# Altium PCB ResistorCard205.PcbDoc
Units mm, origin at the board's own origin, x right, y up, seen from the top; angles counter-clockwise.
Board outline 40 x 25 mm, 2 copper layers (Top Layer, Bottom Layer); 26 components, 184 nets, 76 pads, 0 vias.
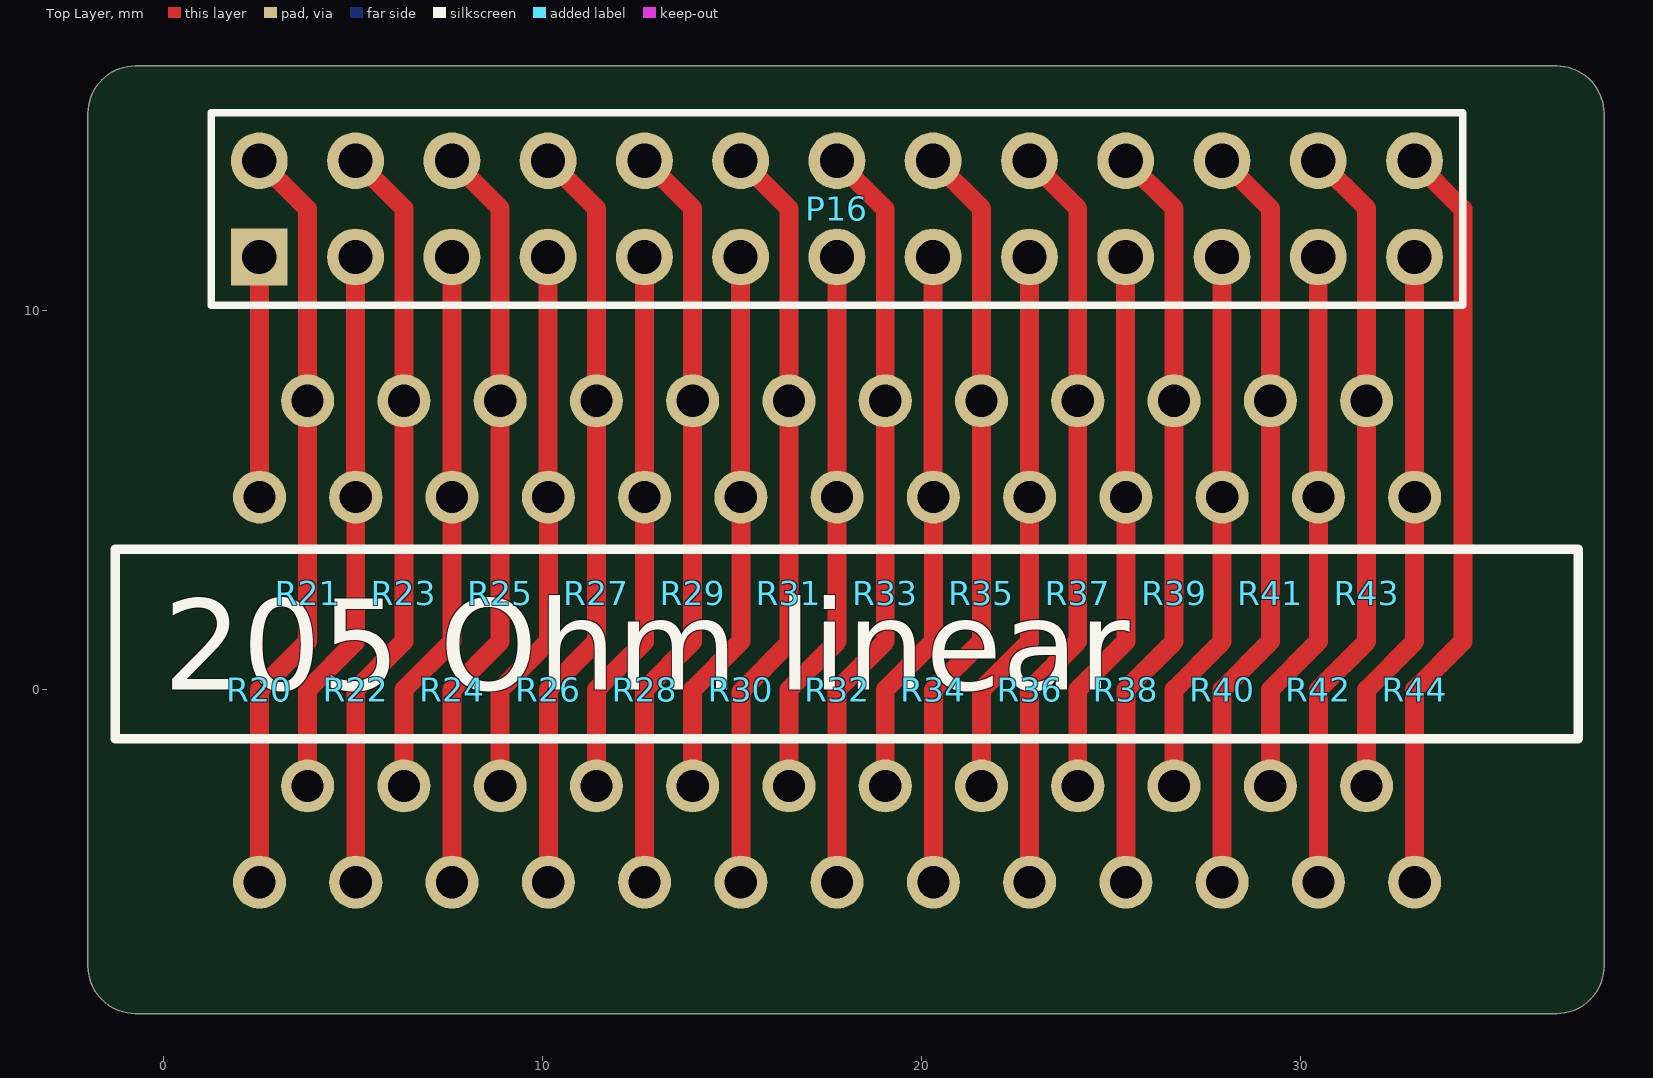
[diagram p0: Top Layer view]
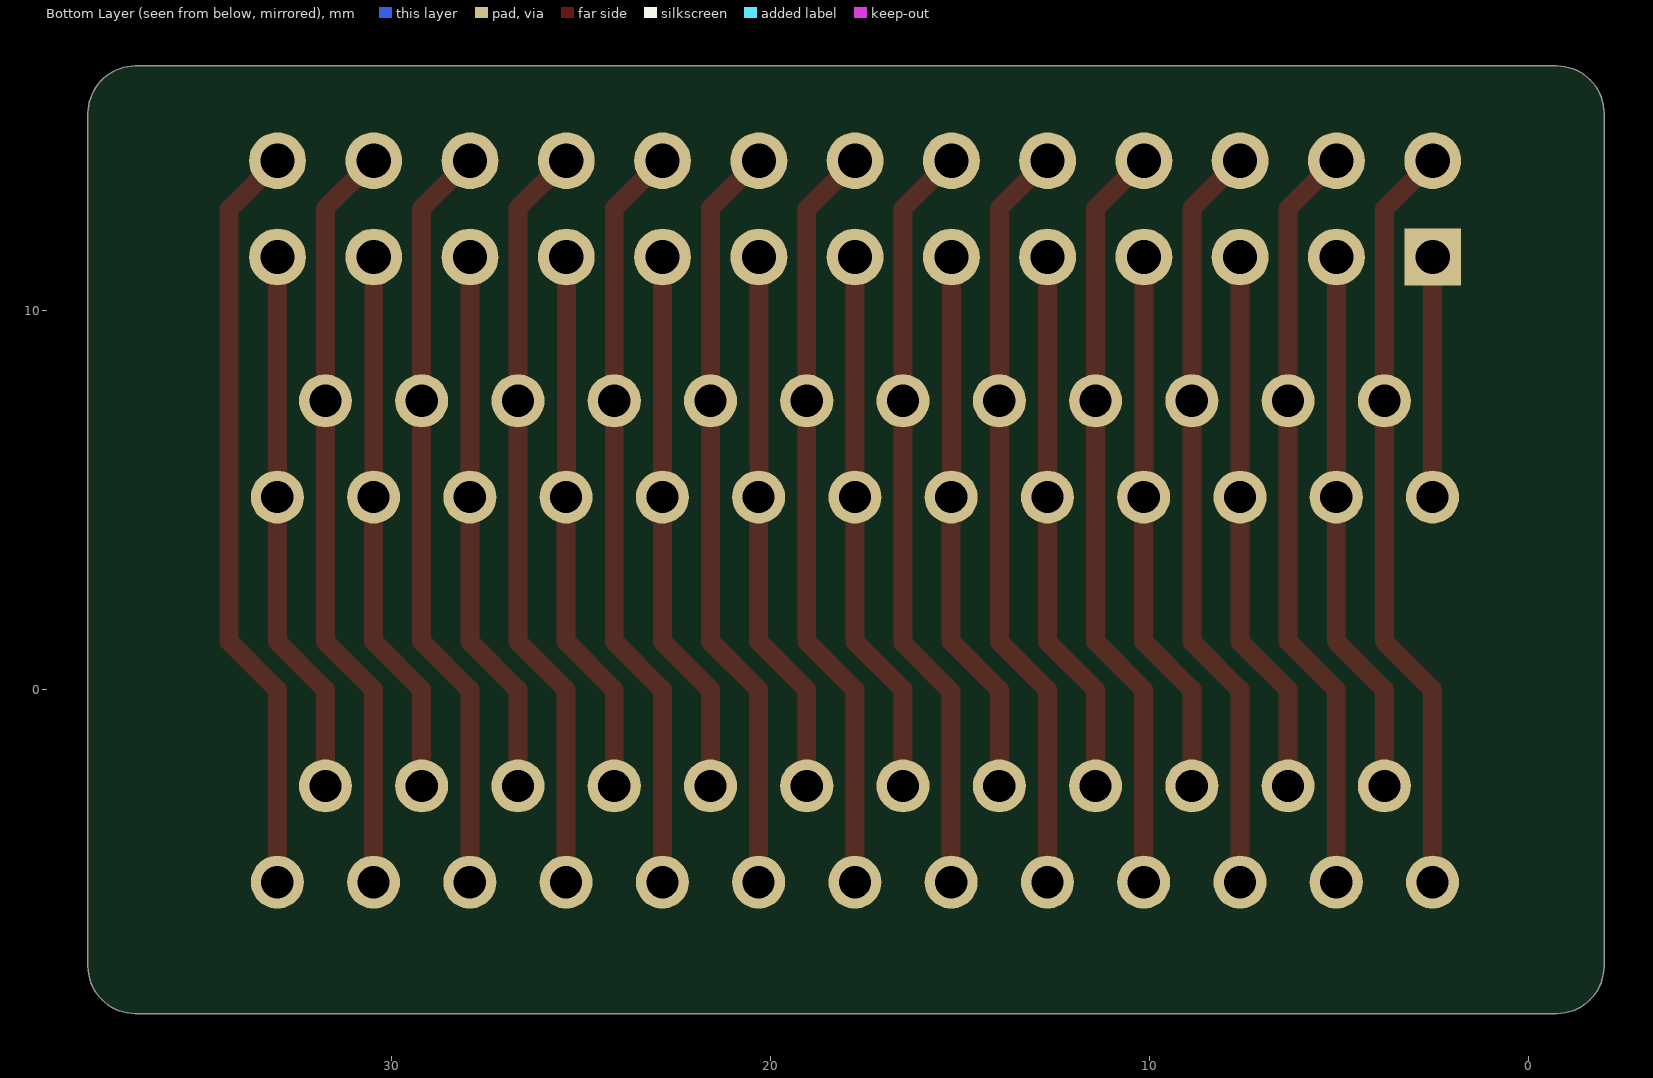
[diagram p1: Bottom Layer view, seen from below]

## Layer stack, top to bottom
Top Solder: solder mask 0.0102, Solder Resist, Dk 3.5
Top Layer: signal copper 0.0356
Dielectric 1: dielectric 0.32, FR-4, Dk 4.8
Bottom Layer: signal copper 0.0356
Bottom Solder: solder mask 0.0102, Solder Resist, Dk 3.5

## Board outline
-1.985,-7.295 -1.985,15.205 cw(c-0.735,15.205) -0.735,16.455 36.765,16.455 cw(c36.765,15.205) 38.015,15.205 38.015,-7.295 cw(c36.765,-7.295) 36.765,-8.545 -0.735,-8.545 cw(c-0.735,-7.295)

## Design rules (kind name [scope] priority, off if disabled: settings)
Clearance [All] p1: gap=0.254
PolygonConnect [All] p1: connectstyle=Relief reliefconductorwidth=0.254 reliefentries=4 polygonreliefangle="90 Angle" airgapwidth=0.254
RoutingVias [All] p1: holewidth=0.711 width=1.27 viastyle="Through Hole" minholewidth=0.711 minwidth=1.27 maxholewidth=0.711 maxwidth=1.27
SolderMaskExpansion [All] p1: expansion=0.102
Width [All] p1: maxlimit=50 minlimit=0.01 preferedwidth=0.254
30 further rules are at their usual default settings.

## Classes and differential pairs
component class ControlBrick1_1: Q1
component class ControlBrick1_0: SW1

## Components (designator, comment, footprint, x,y, rotation, side; value= is the part's Value field where it differs from the comment)
P16 "Header 13X2A" HDR2X13 2.535,11.415 r0 top
R20 "Res2" "Res Linear" 2.54,0 r270 top
R21 "Res2" "Res Linear" 3.81,2.54 r270 top
R22 "Res2" "Res Linear" 5.08,0 r270 top
R23 "Res2" "Res Linear" 6.35,2.54 r270 top
R24 "Res2" "Res Linear" 7.62,0 r270 top
R25 "Res2" "Res Linear" 8.89,2.54 r270 top
R26 "Res2" "Res Linear" 10.16,0 r270 top
R27 "Res2" "Res Linear" 11.43,2.54 r270 top
R28 "Res2" "Res Linear" 12.7,0 r270 top
R29 "Res2" "Res Linear" 13.97,2.54 r270 top
R30 "Res2" "Res Linear" 15.24,0 r270 top
R31 "Res2" "Res Linear" 16.51,2.54 r270 top
R32 "Res2" "Res Linear" 17.78,0 r270 top
R33 "Res2" "Res Linear" 19.05,2.54 r270 top
R34 "Res2" "Res Linear" 20.32,0 r270 top
R35 "Res2" "Res Linear" 21.59,2.54 r270 top
R36 "Res2" "Res Linear" 22.86,0 r270 top
R37 "Res2" "Res Linear" 24.13,2.54 r270 top
R38 "Res2" "Res Linear" 25.4,0 r270 top
R39 "Res2" "Res Linear" 26.67,2.54 r270 top
R40 "Res2" "Res Linear" 27.94,0 r270 top
R41 "Res2" "Res Linear" 29.21,2.54 r270 top
R42 "Res2" "Res Linear" 30.48,0 r270 top
R43 "Res2" "Res Linear" 31.75,2.54 r270 top
R44 "Res2" "Res Linear" 33.02,0 r270 top

## Footprints (in the part's own frame and the unit in brackets; to place one, negate y for a bottom-side part, rotate by r counter-clockwise, add the part's x,y. Pads: shape width x height; smd on the part's side, far side on the other; paste and mask are expansions set on the pad)
HDR2X13 [mm] "Connector; Header; 13x2 Position"
  rect 1.5x1.5 hole 0.9: 1(0,0)
  round 1.5 hole 0.9: 2(0,2.54) 3(2.54,0) 4(2.54,2.54) 5(5.08,0) 6(5.08,2.54) 7(7.62,0) 8(7.62,2.54) 9(10.16,0) 10(10.16,2.54) 11(12.7,0) 12(12.7,2.54) 13(15.24,0) 14(15.24,2.54) 15(17.78,0) 16(17.78,2.54) 17(20.32,0) 18(20.32,2.54) 19(22.86,0) 20(22.86,2.54) 21(25.4,0) 22(25.4,2.54) 23(27.94,0) 24(27.94,2.54) 25(30.48,0) 26(30.48,2.54)
  silkscreen extent -1.27,-1.27 31.75,3.81
"Res Linear" [mm] "linear device what for stackin'"
  round 1.4 hole 0.85: 1(-5.08,0) 2(5.08,0)

## Part data
P16: "Header, 13-Pin, Dual row"
R20 R21 R22 R23 R24 R25 R26 R27 R28 R29 R30 R31 R32 R33 R34 R35 R36 R37 R38 R39 R40 R41 R42 R43 R44: "Resistor"

## Nets (pads, with @x,y where several pads share a name; then routed paths per layer and width w, separated by ;. In a path a pad name is that pad's centre, name@x,y a point inside that pad or via, vN(x,y) a via of type N, cw(c..) or ccw(c..) an arc to the next point about the centre after c; other vN are vias at no path point)
+5V: 
GND: 
NetD1_1: 
NetD1_2: 
NetD2_1: 
NetD2_2: 
NetD3_1: 
NetD5_2: 
NetD7_2: 
NetD8_1: 
NetD9_1: 
NetD9_2: 
NetD11_1: 
NetD12_1: 
NetD13_1: 
NetD13_2: 
NetD14_1: 
NetD14_2: 
NetD15_1: 
NetD16_1: 
NetD17_1: 
NetD17_2: 
NetD18_1: 
NetD18_2: 
NetD20_1: 
NetD20_2: 
NetD21_2: 
NetD22_1: 
NetD23_1: 
NetD25_1: 
NetD25_2: 
NetD27_1: 
NetD27_2: 
NetD28_1: 
NetD28_2: 
NetD29_1: 
NetD30_1: 
NetD31_1: 
NetD31_2: 
NetD33_1: 
NetD34_2: 
NetD35_2: 
NetD36_1: 
NetD36_2: 
NetD38_2: 
NetD39_1: 
NetD39_2: 
NetD40_1: 
NetD40_2: 
NetD41_1: 
NetD42_1: 
NetD43_2: 
NetD44_1: 
NetD45_1: 
NetD46_1: 
NetD47_1: 
NetD48_1: 
NetD49_1: 
NetDP1_1: 
NetDP1_2: 
NetDP1_3: 
NetDP1_4: 
NetDP1_5: 
NetDP1_7: 
NetDP1_8: 
NetDP1_9: 
NetDP1_10: 
NetDP1_11: 
NetDP1_12: 
NetP1_3: 
NetP2_2: 
NetP2_3: 
NetP2_4: 
NetP2_6: 
NetP3_1: 
NetP4_3: 
NetP5_2: 
NetP5_3: 
NetP5_4: 
NetP5_6: 
NetP6_1: 
NetP7_2: 
NetP7_3: 
NetP7_4: 
NetP8_1: 
NetP8_3: 
NetP8_6: 
NetP9_1: 
NetP10_1: 
NetP10_2: 
NetP10_3: 
NetP10_4: 
NetP10_5: 
NetP10_6: 
NetP10_7: 
NetP10_8: 
NetP10_9: 
NetP10_10: 
NetP10_11: 
NetP10_12: 
NetP10_13: 
NetP10_14: 
NetP10_15: 
NetP10_16: 
NetP10_17: 
NetP10_18: 
NetP10_19: 
NetP10_20: 
NetP10_21: 
NetP10_22: 
NetP10_23: 
NetP10_24: 
NetP10_25: 
NetP10_26: 
NetP11_1: 
NetP12_2: 
NetP12_4: 
NetP12_5: 
NetP12_6: 
NetP16_1: P16.1 R20.1 | length 6.3
  Top Layer w0.5: P16.1 2.535,5.085 R20.1
NetP16_2: P16.2 R20.2 R21.1 | length 20.1
  Top Layer w0.5: P16.2 3.81,12.68 R21.1 3.81,1.27 2.54,0 R20.2
NetP16_3: P16.3 R21.2 R22.1 | length 14.5
  Top Layer w0.5: R21.2 3.81,0 5.08,1.27 R22.1 ; R22.1@5.075,5.085 P16.3
NetP16_4: P16.4 R22.2 R23.1 | length 20.1
  Top Layer w0.5: R22.2 5.08,0 6.35,1.27 R23.1 6.35,12.7 P16.4@5.08,13.97
NetP16_5: P16.5 R23.2 R24.1 | length 14.5
  Top Layer w0.5: R23.2 6.35,0 7.62,1.27 R24.1 ; R24.1@7.615,5.085 P16.5
NetP16_6: P16.6 R24.2 R25.1 | length 20.1
  Top Layer w0.5: R24.2 7.62,0 8.89,1.27 R25.1 8.89,12.7 P16.6@7.62,13.97
NetP16_7: P16.7 R25.2 R26.1 | length 14.5
  Top Layer w0.5: R25.2 8.89,0 10.16,1.27 R26.1 ; R26.1@10.155,5.085 P16.7
NetP16_8: P16.8 R26.2 R27.1 | length 20.1
  Top Layer w0.5: R26.2 10.16,0 11.43,1.27 R27.1 11.43,12.7 P16.8@10.16,13.97
NetP16_9: P16.9 R27.2 R28.1 | length 14.5
  Top Layer w0.5: R27.2 11.43,0 12.7,1.27 R28.1 ; R28.1@12.695,5.085 P16.9
NetP16_10: P16.10 R28.2 R29.1 | length 20.1
  Top Layer w0.5: R28.2 12.7,0 13.97,1.27 R29.1 13.97,12.7 P16.10@12.7,13.97
NetP16_11: P16.11 R29.2 R30.1 | length 14.5
  Top Layer w0.5: R29.2 13.97,0 15.24,1.27 R30.1 15.235,5.085 P16.11
NetP16_12: P16.12 R30.2 R31.1 | length 20.1
  Top Layer w0.5: R30.2 15.24,-0.05 16.51,1.22 R31.1 16.51,12.7 P16.12@15.24,13.97
NetP16_13: P16.13 R31.2 R32.1 | length 14.5
  Top Layer w0.5: R31.2 16.51,0 17.78,1.27 R32.1 17.775,5.085 P16.13
NetP16_14: P16.14 R32.2 R33.1 | length 20.1
  Top Layer w0.5: P16.14 19.05,12.68 R33.1 19.05,1.27 17.78,0 R32.2
NetP16_15: P16.15 R33.2 R34.1 | length 14.5
  Top Layer w0.5: R33.2 19.05,0 20.32,1.27 R34.1 ; R34.1@20.315,5.085 P16.15
NetP16_16: P16.16 R34.2 R35.1 | length 20.1
  Top Layer w0.5: R34.2 20.32,0 21.59,1.27 R35.1 21.59,12.7 P16.16@20.32,13.97
NetP16_17: P16.17 R35.2 R36.1 | length 14.5
  Top Layer w0.5: R35.2 21.59,0 22.86,1.27 R36.1 ; R36.1@22.855,5.085 P16.17
NetP16_18: P16.18 R36.2 R37.1 | length 20.1
  Top Layer w0.5: R36.2 22.86,0 24.13,1.27 R37.1 24.13,12.7 P16.18@22.86,13.97
NetP16_19: P16.19 R37.2 R38.1 | length 14.5
  Top Layer w0.5: R37.2 24.13,0 25.4,1.27 R38.1 ; R38.1@25.395,5.085 P16.19
NetP16_20: P16.20 R38.2 R39.1 | length 20.1
  Top Layer w0.5: R38.2 25.4,0 26.67,1.27 R39.1 26.67,12.7 P16.20@25.4,13.97
NetP16_21: P16.21 R39.2 R40.1 | length 14.5
  Top Layer w0.5: R39.2 26.67,0 27.94,1.27 R40.1 ; R40.1@27.935,5.085 P16.21
NetP16_22: P16.22 R40.2 R41.1 | length 20.1
  Top Layer w0.5: R40.2 27.94,0 29.21,1.27 R41.1 29.21,12.7 P16.22@27.94,13.97
NetP16_23: P16.23 R41.2 R42.1 | length 14.5
  Top Layer w0.5: R41.2 29.21,0 30.48,1.27 R42.1 ; R42.1@30.475,5.085 P16.23
NetP16_24: P16.24 R42.2 R43.1 | length 20.1
  Top Layer w0.5: R42.2 30.48,0 31.75,1.27 R43.1 31.75,12.7 P16.24@30.48,13.97
NetP16_25: P16.25 R43.2 R44.1 | length 14.5
  Top Layer w0.5: R43.2 31.75,0 33.02,1.27 R44.1 P16.25@33.02,11.43
NetP16_26: P16.26 R44.2 | length 20.1
  Top Layer w0.5: P16.26 34.29,12.68 34.29,1.27 33.02,0 R44.2
NetP17_2: 
NetP17_3: 
NetP17_4: 
NetP19_2: 
NetP20_1: 
NetP20_3: 
NetP20_4: 
NetP20_5: 
NetP21_2: 
NetP22_1: 
NetP22_4: 
NetP23_1: 
NetP23_2: 
NetP23_3: 
NetP23_4: 
NetQ1_2: 
NetQ3_1: 
NetQ5_1: 
NetQ7_1: 
NetQ8_1: 
NetQ9_1: 
NetQ10_1: 
NetR2_2: 
NetR5_1: 
NetR8_1: 
NetR12_2: 
NetR13_1: 
NetR46_1: 
NetR47_1: 
NetR49_1: 
NetR54_2: 
NetR54_3: 
NetR54_4: 
NetR55_1: 
NetR55_2: 
NetR55_3: 
NetR55_4: 
NetRE8_6: 
V+: 

## Silkscreen, mask and mechanical layers (free items; w line width, h text height)
Top Overlay:
  lines w0.254: -1.27,-1.295 -1.27,3.705 37.338,3.705 37.338,-1.295 19.015,-1.295 -1.27,-1.295
  text "205 Ohm linear" at 0,0 h2.4
Mechanical 1:
  the board outline again, w0.254